# Altium PCB ADSTM32-PCB.PcbDoc
Units mm, origin at the board's own origin, x right, y up, seen from the top; angles counter-clockwise.
Board outline 45.5 x 29 mm, 2 copper layers (Top Layer, Bottom Layer), stack 1.671 mm thick; 30 components, 26 nets, 139 pads, 83 vias.
Unrouted connection lines stored in the file: 1.
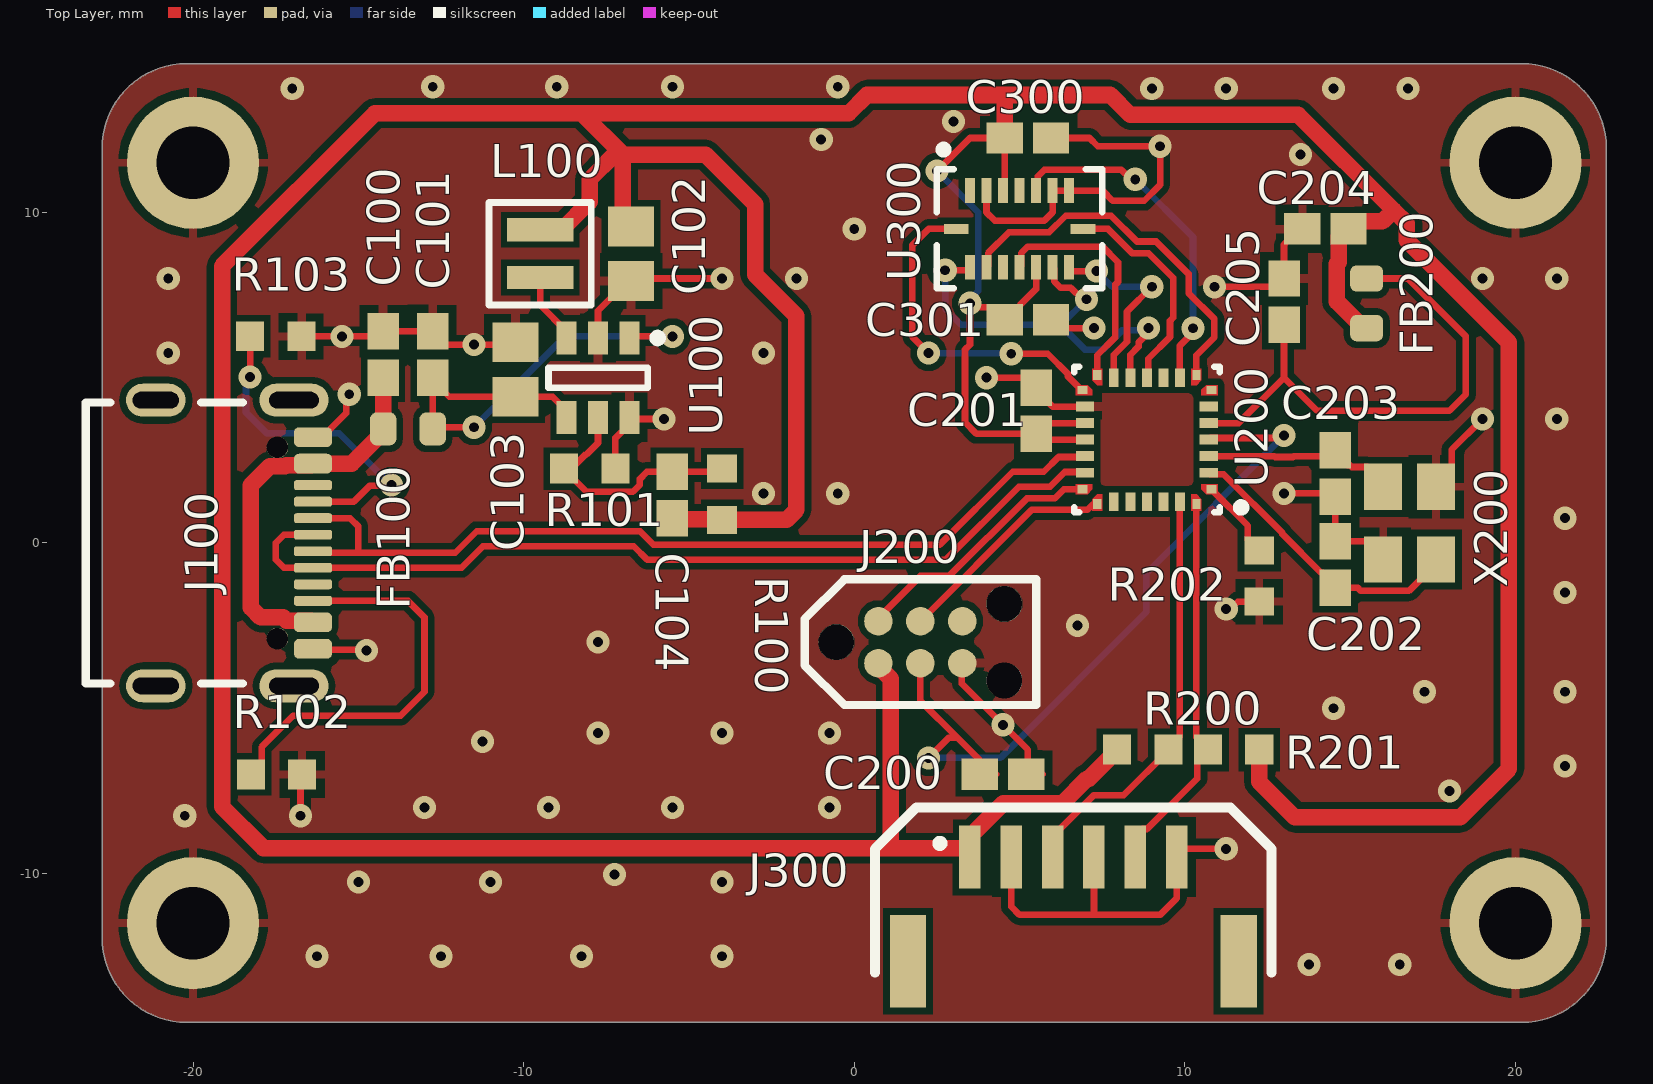
[diagram p0: Top Layer view]
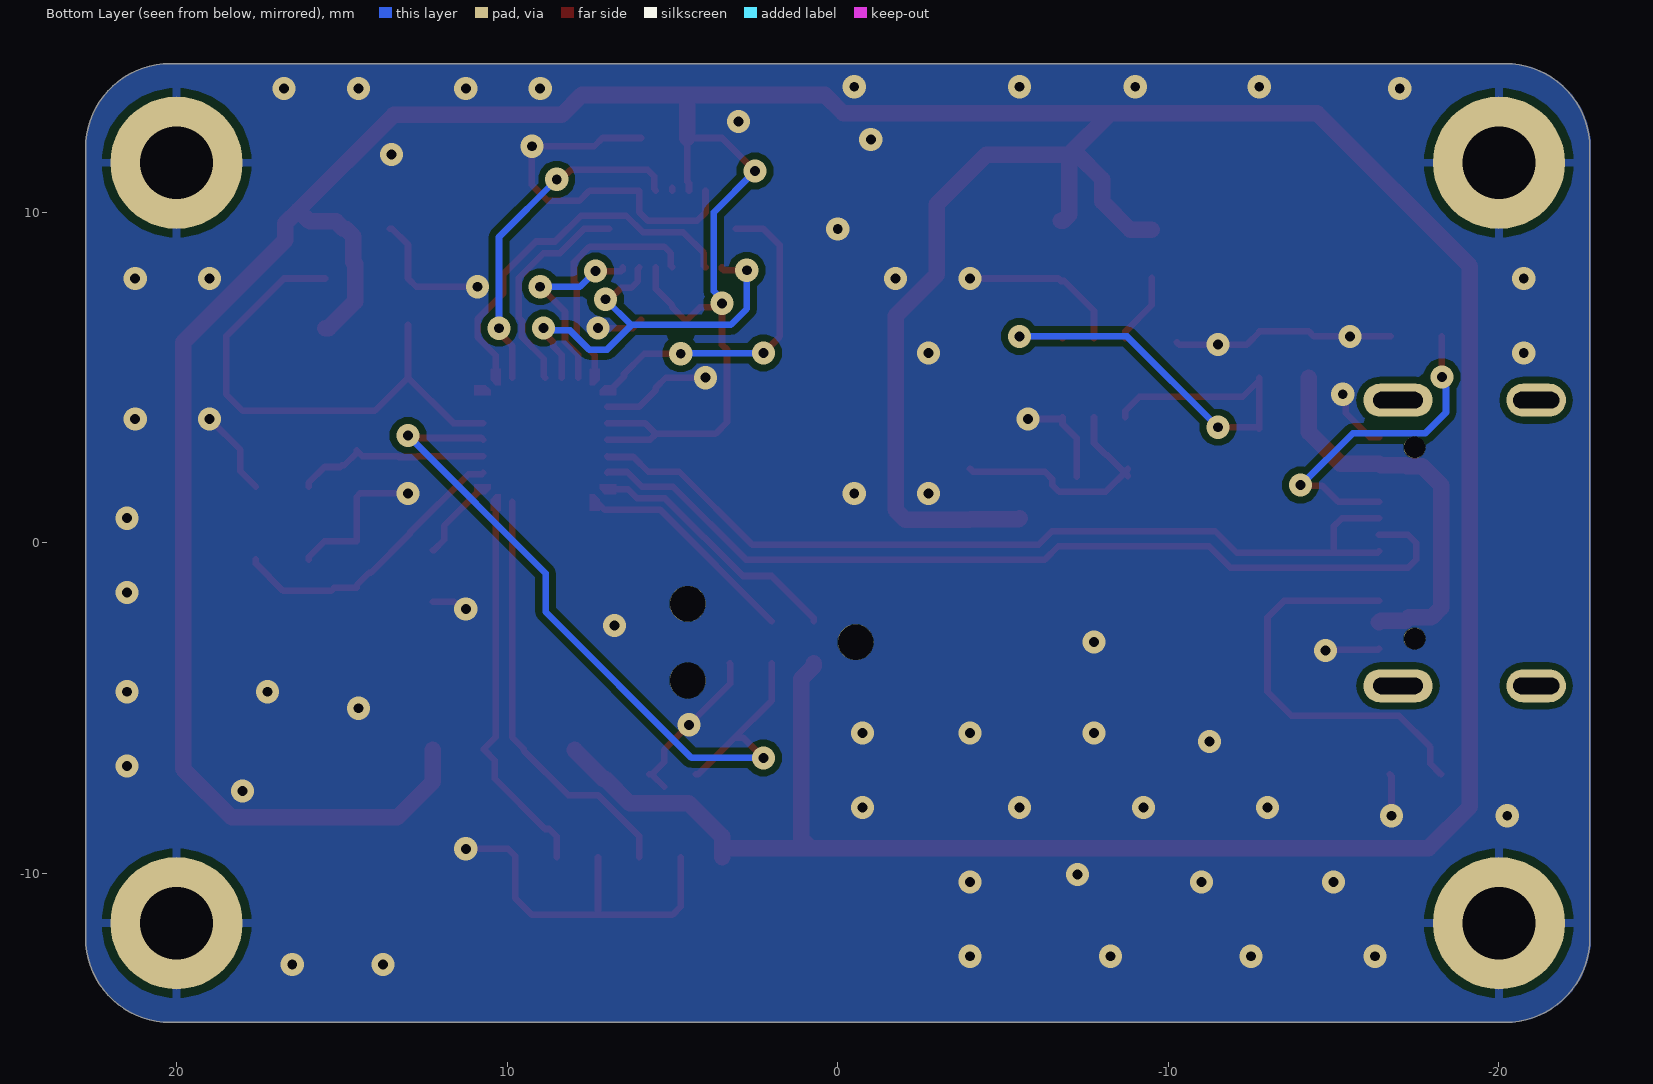
[diagram p1: Bottom Layer view, seen from below]
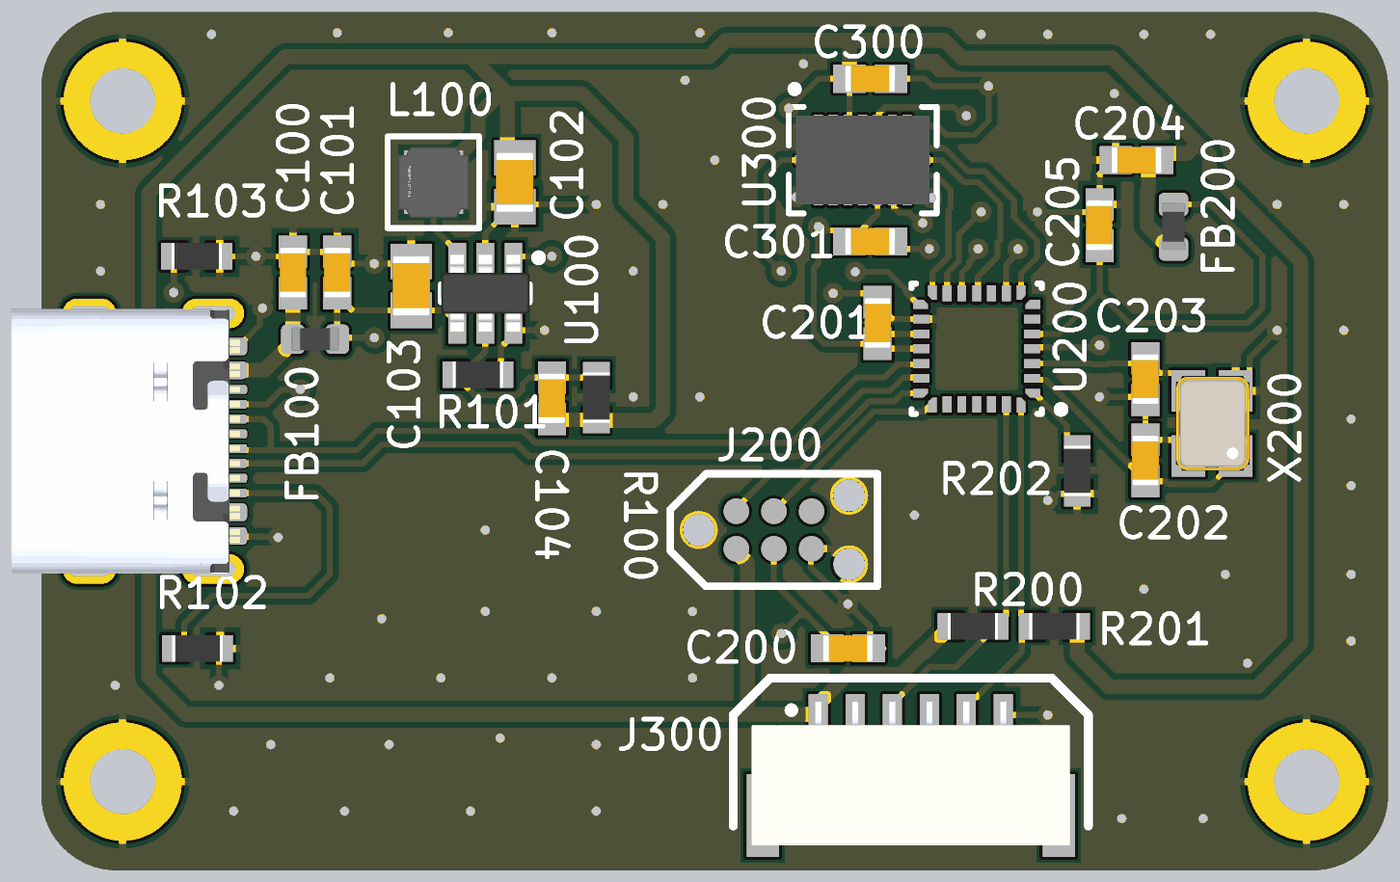
[diagram p2: 3D render of the assembled board from above, using the file's embedded part models]

## Layer stack, top to bottom
Top Solder: solder mask 0.0102, Solder Resist, Dk 3.5
Top Layer: signal copper 0.0356
Dielectric 1: dielectric 1.6, FR-4, Dk 4.6
Bottom Layer: signal copper 0.0356
Bottom Solder: solder mask 0.0102, Solder Resist, Dk 3.5

## Board outline
-22.75,-11.939 -22.75,11.939 cw(c-20.189,11.939) -20.189,14.5 20.189,14.5 cw(c20.189,11.939) 22.75,11.939 22.75,-11.939 cw(c20.189,-11.939) 20.189,-14.5 -20.189,-14.5 cw(c-20.189,-11.939)

## Design rules (kind name [scope] priority, off if disabled: settings)
Clearance [All] p1: gap=0.2 ignorepadtopadclearanceinfootprint=FALSE except(0: Arc-Hole Track-Hole SMDPad-Hole THPad-Hole Via-Hole Fill-Hole Poly-Hole Region-Hole Text-Hole; 0.15: Arc-Arc Arc-Track Arc-SMDPad Track-Track Track-SMDPad SMDPad-SMDPad; 0.254: THPad-THPad; 0.3: Arc-THPad Track-THPad SMDPad-THPad)
DiffPairsRouting [All] p1: maxlimit=0.254 minlimit=0.254 mostfreqgap=0.254 toplayer_minwidth=0.15 toplayer_maxwidth=1 toplayer_prefwidth=0.254 bottomlayer_minwidth=0.15 bottomlayer_maxwidth=1 bottomlayer_prefwidth=0.254 maxuncoupledlength=12.7
PolygonConnect [All] p1: thpad.connectstyle=Relief thpad.reliefconductorwidth=0.254 thpad.reliefentries=4 thpad.polygonreliefangle="90 Angle" thpad.airgapwidth=0.254 smdpad.connectstyle=Relief smdpad.reliefconductorwidth=0.254 smdpad.reliefentries=4 smdpad.polygonreliefangle="90 Angle" smdpad.airgapwidth=0.254 via.connectstyle=Direct via.reliefconductorwidth=0.254 via.reliefentries=4 via.polygonreliefangle="90 Angle" via.airgapwidth=0.254
RoutingVias [All] p1: holewidth=0.3 width=0.7 viastyle="Through Hole" minholewidth=0.25 minwidth=0.6 maxholewidth=0.3 maxwidth=0.7
SolderMaskExpansion [All] p1: expansion=0.102 istentingtop=FALSE
SupplyNets "Schematic Supply Nets_4" [InNet('+3V3')] p1: voltage=0.000
SupplyNets "Schematic Supply Nets_3" [InNet('+3V3A')] p2: voltage=0.000
SupplyNets "Schematic Supply Nets_2" [InNet('+5V')] p3: voltage=0.000
SupplyNets "Schematic Supply Nets_1" [InNet('GND')] p4: voltage=0.000
SupplyNets "Schematic Supply Nets" [InNet('+VUSB')] p5: voltage=0.000
UnRoutedNet [All] p1: checkbadconnections=TRUE
Width [All] p1: maxlimit=1 minlimit=0.15 preferedwidth=0.2 minimp=50.000000 maximp=50.000000 favimp=50.000000
28 further rules are at their usual default settings.

## Classes and differential pairs
differential pair USB_D: +USB_D_P -USB_D_N

## Components (designator, comment, footprint, x,y, rotation, side; value= is the part's Value field where it differs from the comment)
C100 "100n" CAP_0603 -14.25,5.7 r270 top
C101 "100n" CAP_0603 -12.75,5.7 r270 top
C102 "4u7" CAP_0805 -6.75,8.75 r90 top
C103 "4u7" CAP_0805 -10.25,5.25 r270 top
C104 "22p" CAP_0603 -5.5,1.45 r270 top
C200 "100n" CAP_0603 4.5,-7 r180 top
C201 "100n" CAP_0603 5.5,4 r270 top
C202 "10p" CAP_0603 14.55,-0.65 r270 top
C203 "10p" CAP_0603 14.55,2.1 r90 top
C204 "100n" CAP_0603 14.25,9.5 r0 top
C205 "100n" CAP_0603 13,7.3 r270 top
C300 "100n" CAP_0603 5.25,12.25 r180 top
C301 "100n" CAP_0603 5.25,6.75 r180 top
FB100 "120R" FB_0603 -13.5,3.45 r0 top
FB200 "120R" FB_0603 15.5,7.25 r90 top
J100 "USB4101-GF-A-060" USB4105-GF-A-060 -18.75,0 r270 top
J200 "TC2030-IDC-NL" TC2030_NL 2,-3 r0 top
J300 "SM06B-GHS-TB" SM06B-GHS-TB 6.625,-10.15 r0 top
L100 "10u" FP-NRH2412-MFG -9.5,8.75 r90 top
R100 "887k" RES_0603 -4,1.475 r270 top
R101 "280k" RES_0603 -8,2.25 r180 top
R102 "5k1" RES_0603 -17.475,-7 r180 top
R103 "5k1" RES_0603 -17.5,6.25 r180 top
R200 "5k1" RES_0603 8.725,-6.25 r180 top
R201 "5k1" RES_0603 11.475,-6.25 r0 top
R202 "5k1" RES_0603 12.25,-1 r90 top
U100 "LTC3405ES6#TRMPBF" SOT-23-6 -7.75,5 r270 top
U200 "STM32F042G6U6" STM-UFQFPN28_V 8.85,3.125 r180 top
U300 "BMI088" BMI088 5,9.5 r0 top
X200 "24MHz" XTAL_3225 16.8,0.6 r90 top

## Footprints (in the part's own frame and the unit in brackets; to place one, negate y for a bottom-side part, rotate by r counter-clockwise, add the part's x,y. Pads: shape width x height; smd on the part's side, far side on the other; paste and mask are expansions set on the pad)
BMI088 [mm]
  rect 0.3x0.75 smd: 1(-1.5,1.16) 2(-1,1.16) 3(-0.5,1.16) 4(0,1.16) 5(0.5,1.16) 6(1,1.16) 7(1.5,1.16) 9(1.5,-1.16) 10(1,-1.16) 11(0.5,-1.16) 12(0,-1.16) 13(-0.5,-1.16) 14(-1,-1.16) 15(-1.5,-1.16)
  rect 0.75x0.3 smd: 8(1.915,0) 16(-1.915,0)
  silkscreen extent -2.5,-1.8 2.5,2.51, body extent -2.25,-1.5 2.25,1.5, height 1.01
CAP_0603 [mm] "Chip Capacitor, 2-Leads, Body 1.60x0.80mm, IPC Medium Density"
  rect 1.1x0.95 smd: 1(-0.7,0) 2(0.7,0)
  body extent -0.85,-0.45 0.85,0.45, height 0.9
CAP_0805 [mm] "Chip Capacitor, 2-Leads, Body 2.00x1.25mm, IPC Medium Density"
  rect 1.2x1.4 smd: 1(-0.825,0) 2(0.825,0)
  body extent -1.01,-0.63 1.01,0.63, height 1.35
FB_0603 [mm]
  rrect50% 0.8x1 smd: 1(-0.75,0) 2(0.75,0)
  body extent -0.8,-0.4 0.8,0.4, height 0.81
FP-NRH2412-MFG [mm]
  rect 0.7x2 smd paste+0 mask+0: 1(-0.725,0) 2(0.725,0)
  silkscreen extent -1.55,-1.55 1.55,1.55, body extent -1.35,-1.35 1.35,1.35, height 0.25
RES_0603 [mm] "Chip Resistor, 2-Leads, Body 1.60x0.80mm, IPC Medium Density"
  rect 0.85x0.9 smd: 1(-0.775,0) 2(0.775,0)
  body extent -0.85,-0.45 0.85,0.45, height 0.55
SM06B-GHS-TB [mm] "Header Connector 6 Position 1.25MM Pitch SMD Horizontal JST GH"
  rect 0.65x1.9 smd: 1(-3.125,0.65) 2(-1.875,0.65) 3(-0.625,0.65) 4(0.625,0.65) 5(1.875,0.65) 6(3.125,0.65)
  rect 1.1x2.8 smd: ""(-5,-2.5) ""(5,-2.5)
  silkscreen extent -6,-2.85 6,2.15, body extent -5.38,-3.5 5.38,1.35, height 4.26
SOT-23-6 [mm] "SOT23, 6-Leads, Body 2.90x2.45mm, Pitch 0.95mm, IPC Medium Density"
  rect 1x0.6 smd: 1(-1.2,0.95) 2(-1.2,0) 3(-1.2,-0.95) 4(1.2,-0.95) 5(1.2,0) 6(1.2,0.95)
  silkscreen extent -1.32,-1.5 0.3,1.93, body extent -1.3,-1.5 1.3,1.5, height 1.1
STM-UFQFPN28_V [mm] "QFN, 28-Leads, Body 4.1x4.1mm, Pitch 0.5mm"
  rect 0.3x0.25 smd: 1(-1.95,1.5) 7(-1.95,-1.5) 15(1.95,-1.5) 21(1.95,1.5)
  rect 0.55x0.3 smd: 2(-1.875,1) 3(-1.875,0.5) 4(-1.875,0) 5(-1.875,-0.5) 6(-1.875,-1) 16(1.875,-1) 17(1.875,-0.5) 18(1.875,0) 19(1.875,0.5) 20(1.875,1)
  rect 0.25x0.3 smd: 8(-1.5,-1.95) 14(1.5,-1.95) 22(1.5,1.95) 28(-1.5,1.95)
  rect 0.3x0.55 smd: 9(-1,-1.875) 10(-0.5,-1.875) 11(0,-1.875) 12(0.5,-1.875) 13(1,-1.875) 23(1,1.875) 24(0.5,1.875) 25(0,1.875) 26(-0.5,1.875) 27(-1,1.875)
  Top Layer region: -1.35,2.15 -1.35,1.65 -1.505,1.65 -1.65,1.795 -1.65,2.15
  Top Layer region: -2.15,-1.35 -1.65,-1.35 -1.65,-1.505 -1.795,-1.65 -2.15,-1.65
  Top Layer region: -1.35,-2.15 -1.35,-1.65 -1.505,-1.65 -1.65,-1.795 -1.65,-2.15
  Top Layer region: 1.35,-2.15 1.35,-1.65 1.505,-1.65 1.65,-1.795 1.65,-2.15
  Top Layer region: 2.15,1.35 1.65,1.35 1.65,1.505 1.795,1.65 2.15,1.65
  Top Layer region: -2.15,1.35 -1.65,1.35 -1.65,1.505 -1.795,1.65 -2.15,1.65
  Top Layer region: 2.15,-1.35 1.65,-1.35 1.65,-1.505 1.795,-1.65 2.15,-1.65
  Top Layer region: 1.35,2.15 1.35,1.65 1.505,1.65 1.65,1.795 1.65,2.15
  silkscreen extent -2.98,-2.2 2.2,2.2, body extent -2.05,-2.05 2.05,2.05, height 0.6
TC2030_NL [mm]
  round 0.863 smd: 1(-1.27,-0.635) 2(-1.27,0.635) 3(0,-0.635) 4(0,0.635) 5(1.27,-0.635) 6(1.27,0.635)
  round 1.076 hole 1.076 unplated: MH(-2.54,0) MH(2.54,-1.16) MH(2.54,1.16)
  silkscreen extent -3.5,-1.9 3.5,1.9
USB4105-GF-A-060 [mm]
  rrect50% 0.6x1.15 smd mask+0.05: A1B12(-3.2,2.378) A4B9(-2.4,2.378) B1A12(3.2,2.378) B4A9(2.4,2.378)
  rrect50% 0.3x1.15 smd mask+0.05: A5(-1.25,2.378) A6(-0.25,2.378) A7(0.25,2.378) A8(1.25,2.378) B5(1.75,2.378) B6(0.75,2.378) B7(-0.75,2.378) B8(-1.75,2.378)
  round 0.65 hole 0.65 unplated: MH(-2.89,1.303) MH(2.89,1.303)
  oval 1x2.1 hole 0.5 slot 1.5 at 90 deg: SH(-4.32,1.803) SH(4.32,1.803)
  oval 1x1.8 hole 0.5 slot 1.4 at 90 deg: SH(-4.32,-2.377) SH(4.32,-2.377)
  silkscreen extent -4.25,-4.5 4.25,0.25, body extent -4.47,-5 4.47,2.71, height 3.31
XTAL_3225 [mm]
  rect 1.4x1.15 smd: 1(-1.1,-0.8) 2(1.1,-0.8) 3(1.1,0.8) 4(-1.1,0.8)
  body extent -1.6,-1.28 1.6,1.22, height 0.61

## Part data
C100 C101 C200 C201 C202 C203 C204 C205 C300 C301: library part CAP_0603, "Capaictor SMD 0603 Generic"
C102 C103: library part CAP_0805_16V, "Capacitor SMD 0805 Generic", Voltage Rating=16V
C104: library part CAP_0603, "Capaictor SMD 0603 Generic", Voltage Rating=10V
FB100 FB200: library part BMC-Q1JY0120H, "Ferrite Beads BMC-Q 0603 120R 25% Tol. High Current", DC Resistance="0.15 Ohm", Impedance Value="120 Ohm @ 100MHz", Manufacturer=Bourns, Package=0603, Rated Current=1A, Manufacturer Part Number=BMC-Q1JY0120H, Supplier Link=https://eu.mouser.com/ProductDetail/TE-Connectivity-Sigma-Inductors/BMC-Q1JY0120H?qs=sGAEpiMZZMt1hubY80%2Fs8KH3ycnB7WcGc%2FcSUtObKOLmj4JvfvR2Cw%3D%3D
J100: library part USB4105-GF-A-060, "USB connector Type C SMT 12 pin", Manufacturer=GCT, Distributor link=https://eu.mouser.com/ProductDetail/GCT/USB4105-GF-A-060?qs=QNEnbhJQKvY2mocwNJzgfA%3D%3D, Manufacturer Part Number=USB4105-GF-A-060
J200: "Tag-Connect No-Solder SWD Debug Connector (No Legs)", Manufactrer="Tag Connect", Manufacturer Part Number=TC2030-IDC-NL
J300: "Header Connector 6 Position 1.25MM Pitch SMD Horizontal JST GH", Manufacturer=JST, Distributor Link 1=https://www.digikey.co.uk/en/products/detail/jst-sales-america-inc/SM06B-GHS-TB/807790?srsltid=AfmBOopuWliyuZMmwFQasP26N8UGWQ-544t8Du2hpq1pUTE7HfB37_20, Distributor Link 2=https://eu.mouser.com/ProductDetail/JST-Commercial/SM06B-GHS-TBLFSN?qs=dbcCsuKDzFVtzW8gaymizQ==&srsltid=AfmBOopZ7IaGkbagz-tGgYVZR08OuGz3rY7I5JdStK1xvGH3CZodfjQn&_gl=1*1e23q4v*_ga*dW5kZWZpbmVk*_ga_15W4STQT4T*dW5kZWZpbmVk*_ga_1KQLCYKRX3*dW5kZWZpbmVk, Manufacturer Part Number=SM06B-GHS-TB
L100: library part CMP-14484-000582-1, "Shielded Wirewound Inductor 10uH 20% 0.51A 0.72Ω SMD", Case/Package=Nonstandard, Current Rating=450mA, DC Resistance (DCR)=600mR, Inductance=10uH, Max DC Current=810mA, Max Operating Temperature=120°C, Min Operating Temperature=-25°C, Package Quantity=2500, Self Resonant Frequency=29MHz, Test Frequency=100kHz, Tolerance=20%, Core Material=Ferrite, Halogen Free="Halogen Free", Height=1.2mm, Height - Seated (Max)=0.047inch, Length=0.095inch, Mount="Surface Mount", Packaging="Tape and Reel", RoHS Compliant=Yes, Saturation Current=810mA, Shielding=Shielded, Termination=SMD/SMT, Width=0.095inch
R100 R101: library part RES_0603, "Resistor SMD 0603 Generic", Tolerance=1%
R102 R103 R200 R201 R202: library part RES_0603, "Resistor SMD 0603 Generic"
U100: "1.5MHz, 300mA Synchronous Step-Down Regulator in ThinSOT", Manufacturer="Analog Devices", Panufacturer Part Number=LTC3405ES6#TRMPBF
U200: library part CMP-0304-00112-2, "ARM Cortex-M0 32-bit MCU, 32 KB Flash, 6 KB Internal RAM, 24 I/Os, 28-Pin UFQFPN, -40 to 85 degC, Tray", I/Os (High Current)=24, Manufacturer=STMicroelectronics, Operating Frequency(F) (Processor speed) (MHz)=48, Package Description="28-Pin Ultra Thin Fine Pitch Quad Flat No-Lead, 4 x 4 x 0.6 mm Body, 0.5 mm Pitch", Package Reference=UFQFPN28, Supply Voltage(Vcc) min (V)=2, ComponentLink1Description="Manufacturer URL", ComponentLink1URL=http://www.st.com/, ComponentLink2Description=Datasheet, ComponentLink2URL=http://www.st.com/st-web-ui/static/active/en/resource/technical/document/datasheet/DM00105814.pdf, Core="ARM Cortex-M0", DatasheetVersion="Rev. 5", FLASH Size (Prog) (kB)=32, Internal RAM Size (kB)=6, Mounting Technology="Surface Mount", Packing=Tray, PartNumber=STM32F042G6U6
U300: "Inertial Measurement Unit (IMU) 6-axis 16bit", Manufacturer=Bosch, Distributor link=https://eu.mouser.com/ProductDetail/Bosch-Sensortec/BMI088?qs=f9yNj16SXrIMFspTV6RB6Q%3D%3D, Manufacturer Part Number=BMI088
X200: library part TSX-3225_24.0000MF20G-AC3, "Crystal SMD 24MHz 10PPM 9pF", Manufacturer=Epson, Manufacturer Part Number=TSX-3225_24.0000MF20G-AC3, Supplier Link=https://www.mouser.co.uk/ProductDetail/Epson-Timing/TSX-3225-24.0000MF20G-AC3?qs=tC2qD9afNgou1YHpctmuPA%3D%3D&srsltid=AfmBOoouiOfIznH0zW1dtqsynOn3XHi3SewUDh2izLsmfH-7_t8qZOyb

## Free pads (board coordinates)
  round 4 hole 2.2 unplated: MH(-20,-11.5) MH(-20,11.5) MH(20,-11.5) MH(20,11.5)

## Via types
v1: diameter 0.7, hole 0.3, Top Layer to Bottom Layer, tented both sides, 83 vias

## Nets (pads, with @x,y where several pads share a name; then routed paths per layer and width w, separated by ;. In a path a pad name is that pad's centre, name@x,y a point inside that pad or via, vN(x,y) a via of type N, cw(c..) or ccw(c..) an arc to the next point about the centre after c; other vN are vias at no path point)
+3V3: C102.2 C104.2 C201.2 C204.2 C300.2 C301.2 FB200.1 J200.1 J300.1 L100.2 R100.2 R200.2 R201.2 U200.17 U200.18 U300.3 U300.11 | length 172.4
  Top Layer w0.2: v1(2.5,11.25) 3.5,12.25 C300.2 4.55,10.935 4.5,10.885 U300.3 ; U300.11 5.5,7.679 5,7.179 5,7.125 4.625,6.75 C301.2 4.175,7.125 3.76,7.125 3.635,7.25 v1(3.5,7.25) 3.5,5.998 3.35,5.848 3.35,3.65 3.7,3.3 C201.2 ; U200.18 5.675,3.125 C201.2 ; U200.17 5.825,3.625 C201.2
  Top Layer w0.5: L100.2 -8.85,9.475 -8,10.325 -8,11 -7.25,11.75 -7,11.75 ; C102.2@-6.75,9.75 -6.825,9.75 -7,9.925 -7,11.75 ; C104.2 -5.475,0.725 -4.025,0.725 R100.2 -2.05,0.7 -1.75,1 -1.75,6.869 -3,8.119 -3,10.25 -4.5,11.75 -7,11.75 ; J200.1 0.73,-3.732 1.107,-4.109 1.107,-8.936 0.814,-9.229 ; C300.2 4.55,13.5 4.5,13.55 ; R200.2 7.95,-6.275 7.1,-7.125 7.043,-7.125 6.293,-7.875 4.5,-7.875 3.5,-8.875 J300.1 3.5,-9.304 3.425,-9.229 0.814,-9.229 ; R201.2 12.25,-7.225 13.325,-8.3 18.331,-8.3 19.8,-6.831 19.8,6.069 16.716,9.153 16.716,9.666 16.316,10.066 ; FB200.1 15.4,6.5 14.6,7.3 14.6,8.449 14.65,8.499 14.65,9.275 14.875,9.5 C204.2 15.175,9.725 15.975,9.725 16.316,10.066 ; -8.25,13 -0.169,13 0.381,13.55 4.5,13.55 ; -8.25,13 -7,11.75 ; -8.25,13 -14.5,13 -19.123,8.377 -19.123,-7.979 -17.873,-9.229 0.814,-9.229 ; 4.5,13.55 7.75,13.55 8.35,12.95 13.431,12.95 16.316,10.066
  Bottom Layer w0.2: v1(2.5,11.25) 3.75,10 3.75,7.617 3.5,7.367 v1(3.5,7.25)
+3V3A: C205.2 FB200.2 U200.5 | length 16
  Top Layer w0.2: U200.5 11.625,3.625 13,5 ; C205.2 13,5 ; FB200.2 16.75,8 18.5,6.25 18.5,4.5 18,4 14,4 13,5
+5V: C101.2 C103.2 FB100.2 U100.1 U100.4 | length 16
  Top Layer w0.2: v1(-11.5,3.5) -12.7,3.5 FB100.2 C101.2 -12.75,4.925 -12.25,4.425 C103.2 -9.125,4.425 -8.7,4 U100.4 ; U100.1 -6.75,6.25 v1(-5.5,6.25)
  Bottom Layer w0.2: v1(-11.5,3.5) -8.75,6.25 v1(-5.5,6.25)
+VUSB: C100.2 FB100.1 J100.A4B9 J100.B4A9 | length 12.1
  Top Layer w0.5: J100.B4A9 -16.422,-2.35 -17.174,-2.35 -17.274,-2.25 -17.957,-2.25 -18.25,-1.957 -18.25,1.75 -17.685,2.315 -17.209,2.315 -17.174,2.35 -16.422,2.35 J100.A4B9 -15.2,2.4 -14.25,3.35 FB100.1 C100.2
BOOT0: R202.2 U200.1 | length 2.5
  Top Layer w0.2: U200.1 10.825,1.625 10.85,1.6 10.85,1.575 11.9,0.525 11.9,0.1 12.225,-0.225 R202.2
BUCK_SW: L100.1 U100.3 | length 2.2
  Top Layer w0.2: L100.1 -9.5,7.2 -8.7,6.4 U100.3
BUCK_VFB: C104.1 R100.1 R101.2 U100.5 | length 7.7
  Top Layer w0.2: R101.2@-8.775,2.025 -8.113,2.688 -8.087,2.688 -7.75,3.025 U100.5 ; R101.2 -8.775,2.225 -8.1,1.55 -6.696,1.55 -6.486,1.761 -6.486,1.939 -6.275,2.15 C104.1 -4.1,2.15 R100.1
GND: C100.1 C101.1 C102.1 C103.1 C200.1 C201.1 C202.1 C203.1 C204.1 C205.1 C300.1 C301.1 J100.A1B12 J100.B1A12 J200.5 J300.2 J300.4 J300.6 pad.MH R101.1 R102.1 R103.1 R202.1 U100.2 U100.6 U200.16 U300.2 U300.4 U300.6 U300.7 X200.2 X200.4 | length 64.9
  Top Layer w0.2: v1(-16.75,-8.25) -16.75,-7.05 R102.1 ; R103.1 v1(-15.5,6.25) -14.4,6.25 C100.1 C101.1 -12.75,6.375 -12.375,6 v1(-11.5,6) -10.325,6 C103.1 ; J100.B1A12 -16.347,-3.225 -14.775,-3.225 v1(-14.75,-3.25) ; J100.A1B12 -16.097,3.2 -15.371,3.926 -15.371,4.404 v1(-15.275,4.5) ; U100.2 -7.75,7.025 -6.85,7.925 C102.1 -6.675,8 v1(-4,8) ; R101.1@-7.225,2 -7.225,3.175 -6.8,3.6 U100.6 -6.75,3.75 v1(-5.75,3.75) ; J200.5 3.25,-3.655 3.25,-4.25 v1(4.5,-5.5) 5.25,-6.25 5.25,-6.625 C200.1@5.625,-7 ; v1(4,5) 5.2,5 C201.1 5.5,4.625 6,4.125 U200.16 ; U300.2 4,10 4.25,9.75 5.75,9.75 6,10 U300.6 U300.7 7.505,10.66 7.815,10.35 8.769,10.35 9.25,10.831 v1(9.25,12) 7.365,12 7.115,12.25 C300.1 ; J300.2 4.75,-11 5,-11.25 7.25,-11.25 ; U300.4 U300.4@5,10.75 ; C200.1@5.25,-7.375 C200.1@5.625,-7 ; C200.1@5.7,-7 C200.1@5.625,-7 ; C301.1 6.2,6.5 v1(7.25,6.5) ; J300.4 7.25,-11.25 ; v1(10.9,7.75) 12.75,7.75 C205.1 13,9.025 13.475,9.5 C204.1 ; v1(11.25,-9.25) 9.975,-9.25 9.75,-9.475 J300.6 9.75,-10.75 9.25,-11.25 7.25,-11.25 ; v1(11.25,-2) 11.373,-2 11.598,-1.775 R202.1 ; v1(13,1.5) 14.45,1.5 C203.1 C202.1 15.525,0.05 16,-0.425 X200.4 ; X200.2 18.075,2.175 18.075,2.825 v1(19,3.75)
  other v1: 13.75,-12.75 16.5,-12.75 -16.25,-12.5 -12.5,-12.5 -8.25,-12.5 -4,-12.5 -15,-10.25 -11,-10.25 -4,-10.25 -7.25,-10.029 -20.25,-8.25 -13,-8 -9.25,-8 -5.5,-8 -0.75,-8 18,-7.5 21.5,-6.75 -11.25,-6 -7.75,-5.75 -4,-5.75 -0.75,-5.75 14.5,-5 17.25,-4.5 21.5,-4.5 -7.75,-3 6.75,-2.5 21.5,-1.5 21.5,0.75 -2.75,1.5 -0.5,1.5 21.25,3.75 -20.75,5.75 -2.75,5.75 -20.75,8 -1.75,8 19,8 21.25,8 0,9.5 13.5,11.75 -1,12.2 3,12.75 -17,13.75 9,13.75 11.25,13.75 14.5,13.75 16.75,13.75 -12.75,13.8 -9,13.8 -5.5,13.8 -0.5,13.8
I2C_SCL: J300.3 R200.1 U200.27 | length 12.8
  Top Layer w0.2: J300.3 6,-8.875 7.25,-7.625 8.15,-7.625 9.5,-6.275 R200.1 ; R200.1@9.5,-6.225 9.85,-5.875 U200.27
I2C_SDA: J300.5 R201.1 U200.28 | length 11.8
  Top Layer w0.2: J300.5 8.5,-8.875 8.725,-8.65 8.85,-8.65 10.375,-7.125 10.375,-6.575 R201.1 10.7,-6.225 10.35,-5.875 U200.28
IMU_INT1: U200.15 U300.16 | length 10.2
  Top Layer w0.2: v1(2.25,5.75) 1.75,6.25 1.75,9 2.25,9.5 U300.16 ; v1(4.748,5.725) 5.854,5.725 6.464,5.114 6.464,5.036 6.875,4.625 U200.15
  Bottom Layer w0.2: v1(2.25,5.75) 2.263,5.737 4.735,5.737 v1(4.748,5.725)
IMU_INT2: U200.14 U300.12 | length 7.3
  Top Layer w0.2: U300.12 5.05,8.39 5.05,8.769 5.246,8.965 7.504,8.965 7.978,8.491 7.978,7.896 7.9,7.819 7.9,6.231 7.35,5.681 U200.14
IMU_MISO: U200.12 U300.10 U300.15 | length 13.4
  Top Layer w0.2: v1(2.75,8.25) 3.45,8.25 3.5,8.3 U300.15 ; U300.10 6.05,8.29 6.05,7.911 6.246,7.715 6.552,7.715 6.895,7.373 v1(7.03,7.373) ; U200.12 8.35,5.691 8.6,5.941 8.6,6.065 8.9,6.365 v1(8.9,6.5)
  Bottom Layer w0.2: v1(2.75,8.25) 2.75,7.081 3.231,6.6 6.257,6.6 ; v1(7.03,7.373) 6.257,6.6 ; v1(8.9,6.5) 8.831,6.431 8.1,6.431 7.519,5.85 6.981,5.85 6.257,6.574 6.257,6.6
IMU_MOSI: U200.13 U300.9 | length 6
  Top Layer w0.2: U300.9 6.5,8.272 6.55,8.222 v1(7.328,8.222) ; U200.13 7.85,5.686 8.25,6.086 8.25,7 v1(9,7.75)
  Bottom Layer w0.2: v1(7.328,8.222) 7.8,7.75 v1(9,7.75)
IMU_NCS_ACC: U200.8 U300.14 | length 11.3
  Top Layer w0.2: U300.14 4.05,8.39 4.05,8.769 4.681,9.4 5.895,9.4 6.395,9.9 7.769,9.9 8.551,9.119 9.131,9.119 10.113,8.137 10.113,7.556 10.894,6.775 10.894,6.222 10.35,5.678 U200.8
IMU_NCS_GYR: U200.9 U300.5 | length 10.5
  Top Layer w0.2: U300.5 5.55,10.71 5.55,11.089 5.746,11.285 8.08,11.285 8.365,11 v1(8.5,11) ; U200.9 9.85,5.97 10.244,6.364 v1(10.244,6.494)
  Bottom Layer w0.2: v1(8.5,11) 10.244,9.256 v1(10.244,6.494)
IMU_SCK: U200.11 U300.8 | length 6.7
  Top Layer w0.2: U300.8 7.674,9.5 8.415,8.76 8.91,8.76 9.65,8.019 9.65,6.819 9.55,6.719 9.55,6.231 8.894,5.575 8.894,5.044 U200.11
NetJ100_A5: J100.A5 R103.2 | length 10.2
  Top Layer w0.2: v1(-18.275,5.025) R103.2 ; J100.A5 -15.135,1.25 -14.65,1.735 -14.015,1.735 v1(-14,1.75)
  Bottom Layer w0.2: v1(-18.275,5.025) -18.371,4.929 -18.371,4.719 -18.397,4.693 -18.397,3.947 -17.765,3.315 -15.579,3.315 -14.014,1.75 v1(-14,1.75)
NetJ100_B5: J100.B5 R102.2 | length 12.4
  Top Layer w0.2: R102.2 -17.925,-6.675 -17.925,-6.175 -16.97,-5.22 -13.72,-5.22 -13,-4.5 -13,-2.25 -13.5,-1.75 J100.B5
NRST: C200.2 J200.3 U200.4 | length 23.3
  Top Layer w0.2: J200.3 2,-4.775 3.113,-5.888 ; v1(2.25,-6.5) 2.862,-5.888 3.113,-5.888 ; C200.2@4.3,-7 4.225,-7 3.113,-5.888 ; U200.4 10.775,3.175 12.925,3.175 v1(13,3.25)
  Bottom Layer w0.2: v1(2.25,-6.5) 4.419,-6.5 8.837,-2.082 8.837,-0.913 v1(13,3.25)
OSC_IN: C202.2 U200.2 X200.1 | length 8.9
  Top Layer w0.2: U200.2 10.775,2.075 11.179,2.075 12.95,0.304 12.95,0.271 14.121,-0.9 14.175,-0.9 14.55,-1.275 C202.2 15.221,-1.35 15.321,-1.45 16.775,-1.45 17.6,-0.625 X200.1
OSC_OUT: C203.2 U200.3 X200.3 | length 5.9
  Top Layer w0.2: U200.3 12.706,2.625 12.731,2.6 13.269,2.6 13.294,2.625 14.375,2.625 C203.2 14.55,2.725 14.925,2.35 15,2.35 15.05,2.3 15.525,2.3 16,1.825 X200.3
SWCLK: J200.4 U200.22 | length 6.8
  Top Layer w0.2: J200.4 5.365,1 7.048,1 7.2,1.153 7.328,1.153 U200.22
SWDIO: J200.2 U200.21 | length 7.9
  Top Layer w0.2: J200.2 0.73,-2.27 2,-1 2.87,-1 5.22,1.35 6.066,1.35 6.341,1.625 U200.21
USB_D_N: J100.A7 J100.B7 U200.19 | length 27.2
  Top Layer w0.2: J100.A7 -16.326,-0.296 -15,-0.296 ; J100.B7 -15.25,0.75 -15,0.5 -15,-0.296 ; U200.19 6.952,2.602 6.181,2.602 5.733,2.154 4.794,2.154 2.59,-0.05 -6.079,-0.05 -6.483,0.354 -11.419,0.354 -12.069,-0.296 -15,-0.296
USB_D_P: J100.A6 J100.B6 U200.20 | length 27.9
  Top Layer w0.2: J100.A6 -17.25,0.25 -17.5,0 -17.5,-0.5 -17.25,-0.75 J100.B6 -11.881,-0.75 -11.231,-0.1 -6.671,-0.1 -6.267,-0.504 2.779,-0.504 4.983,1.7 5.921,1.7 6.369,2.148 6.952,2.148 U200.20
pads on no net: J100.A8 J100.B8 J100.MH J100.SH J200.6 J200.MH J300. U200.6 U200.7 U200.10 U200.23 U200.24 U200.25 U200.26 U300.1 U300.13

## Polygon pours and split planes (outlines as drawn)
GND on Bottom Layer "NONET_L-01_P-001" (solid, pour order 3): -22.776,-11.948 ccw(c-20.236,-11.948) -22.032,-13.744 -22.02,-13.756 ccw(c-20.224,-11.96) -20.224,-14.5 20.224,-14.5 ccw(c20.224,-12.086) 21.931,-13.793 21.98,-13.744 ccw(c20.184,-11.948) 22.724,-11.948 22.724,11.948 ccw(c20.184,11.948) 21.98,13.744 21.968,13.756 ccw(c20.172,11.96) 20.172,14.5 -20.224,14.5 ccw(c-20.224,11.96) -22.02,13.756 -22.032,13.744 ccw(c-20.236,11.948) -22.776,11.948
GND on Top Layer "NONET_L-01_P-001" (solid, pour order 8): -22.75,-11.948 ccw(c-20.21,-11.948) -22.006,-13.744 -21.994,-13.756 ccw(c-20.198,-11.96) -20.198,-14.5 20.25,-14.5 ccw(c20.25,-12.086) 21.957,-13.793 22.006,-13.744 ccw(c20.21,-11.948) 22.75,-11.948 22.75,11.948 ccw(c20.21,11.948) 22.006,13.744 21.994,13.756 ccw(c20.198,11.96) 20.198,14.5 -20.198,14.5 ccw(c-20.198,11.96) -21.994,13.756 -22.006,13.744 ccw(c-20.21,11.948) -22.75,11.948

## Silkscreen, mask and mechanical layers (free items; w line width, h text height)
Mechanical 1:
  lines w0.2: -22.75,-11.939 ccw(c-20.189,-11.939) -20.189,-14.5 10.98,-14.5 20.189,-14.5 ccw(c20.189,-11.939) 22.75,-11.939 22.75,11.939 ccw(c20.189,11.939) 20.189,14.5 10.98,14.5 -20.189,14.5 ccw(c-20.189,11.939) -22.75,11.939 -22.75,-10.5 -22.75,-11.939